# EAGLE board L2-Big (EAGLE 7.2.0)
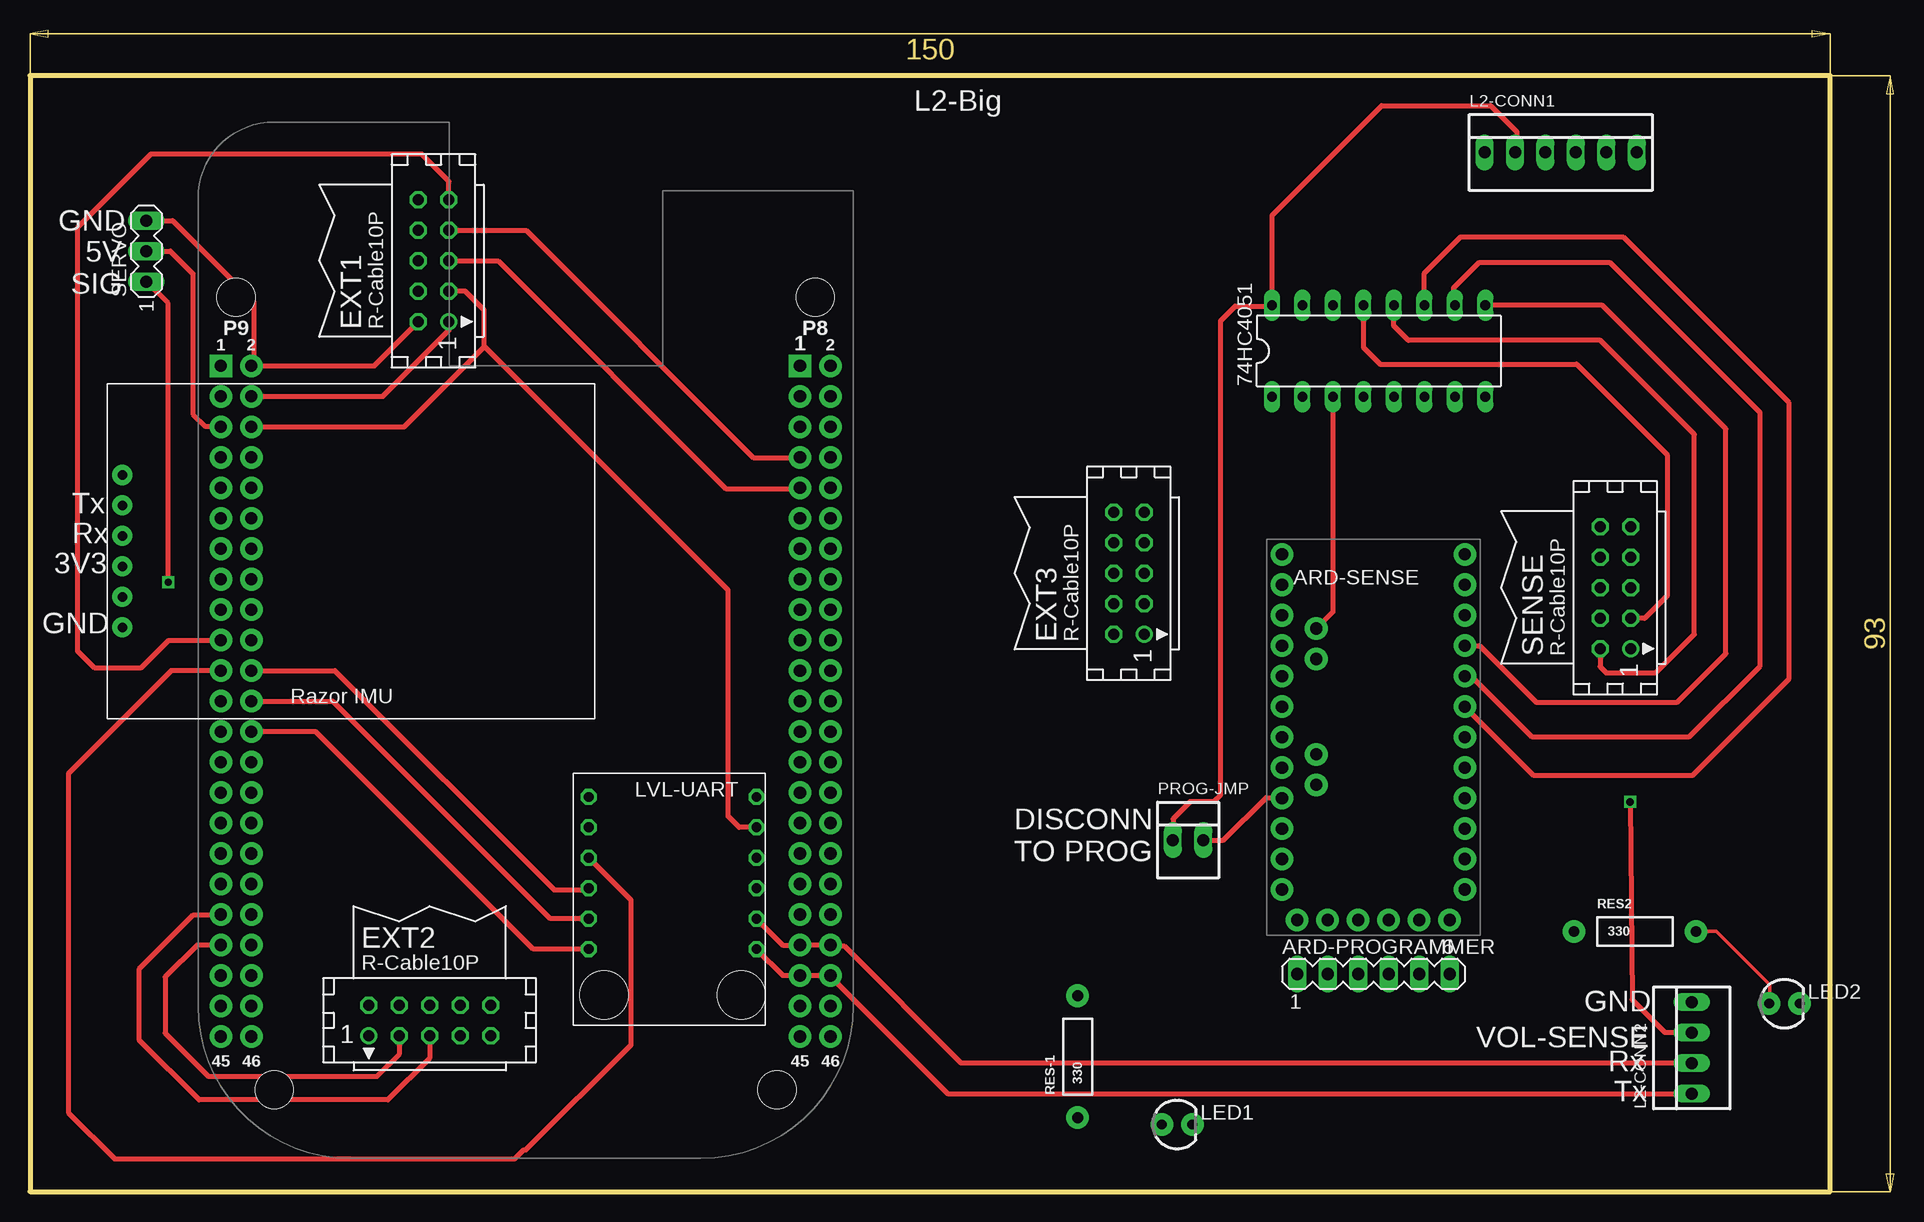
[diagram p0: board, top side]
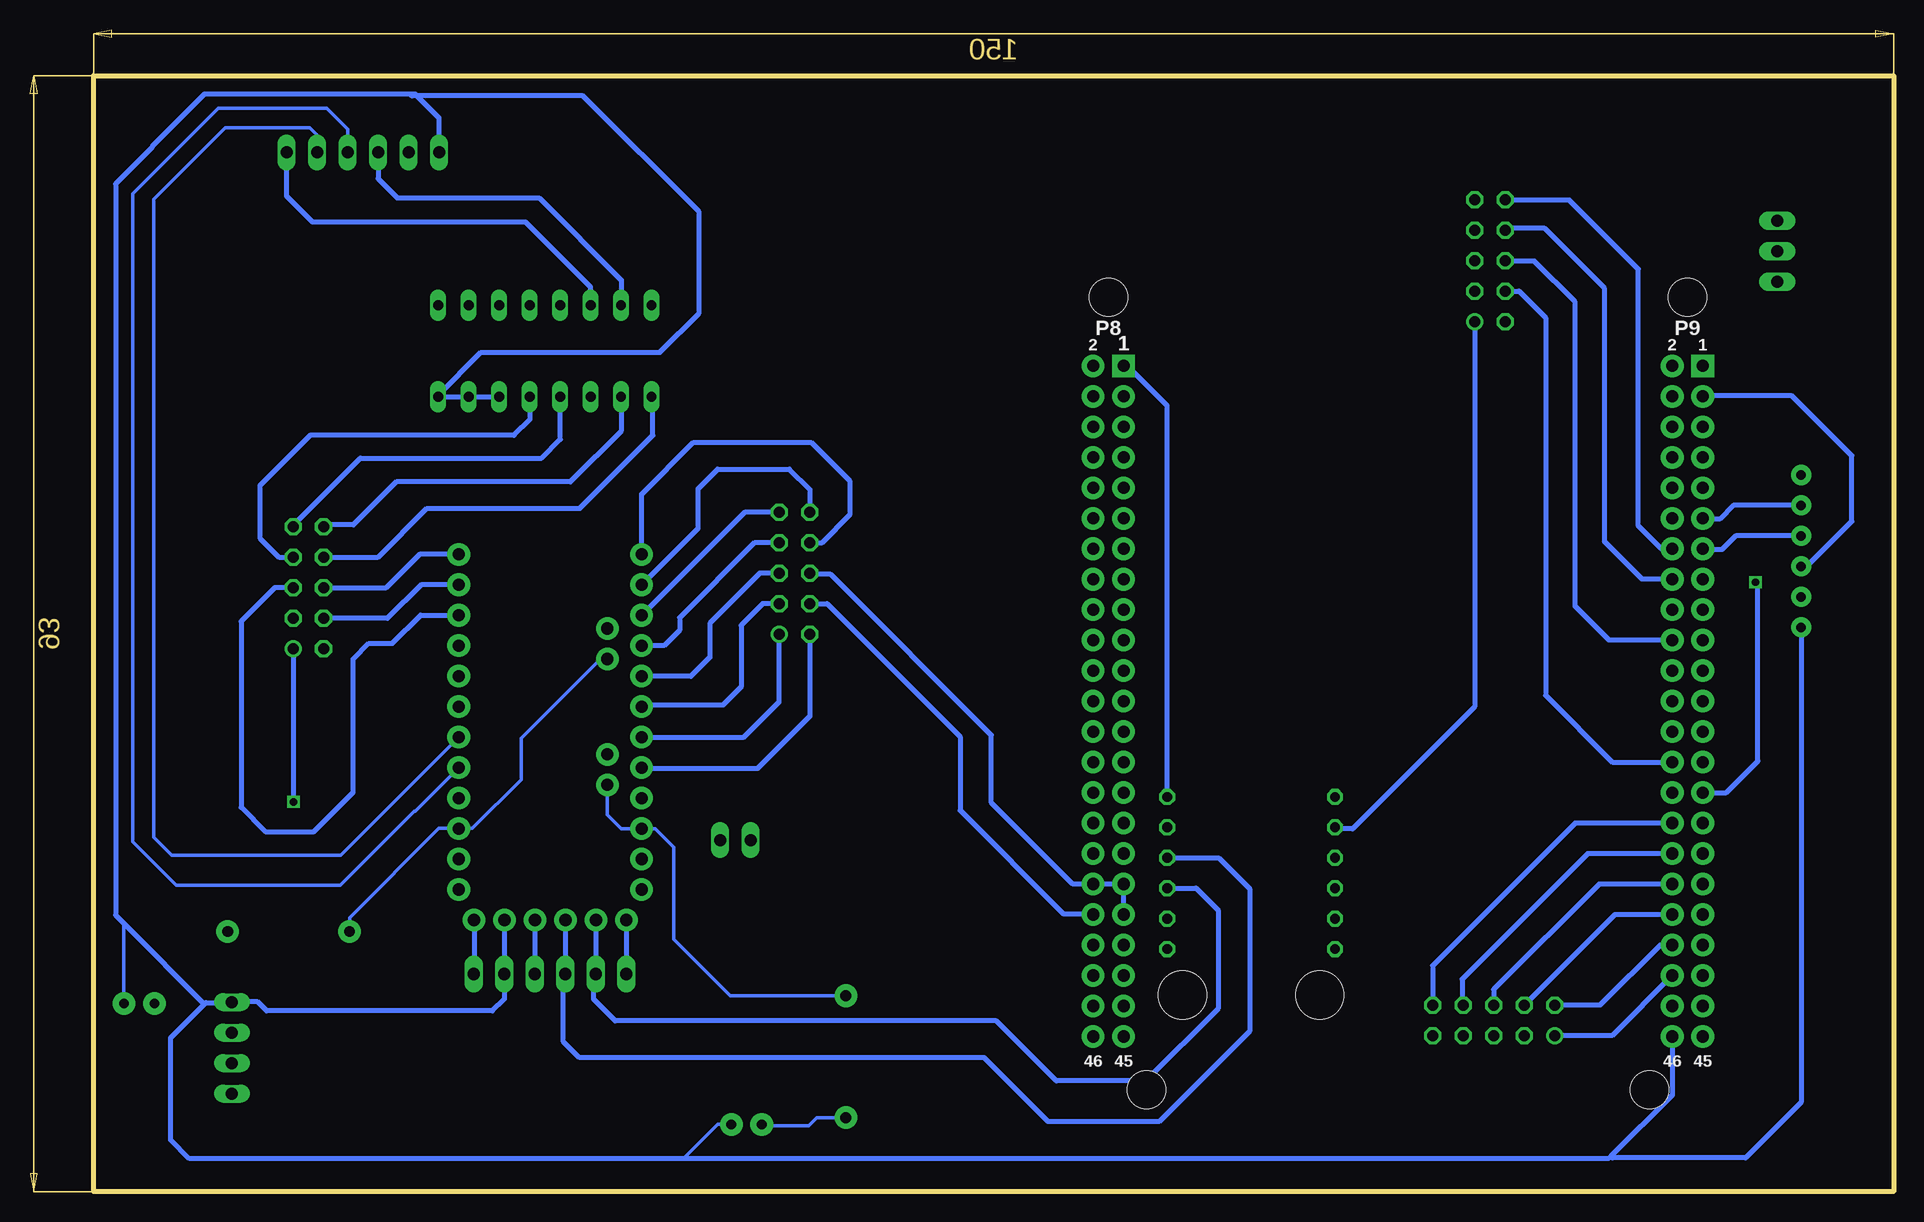
[diagram p1: board, bottom side, seen from below]

Size 150 x 93 mm. Coordinates in mm from the lower left corner, seen from the top.
Outline: 150,0 150,93 0,93 0,0 150,0
Copper layers (1*16): Top 0.035mm / dielectric 1.5mm / Bottom 0.035mm
Design rules "default": minimum track width 10mil, minimum drill 24mil, track to track 8mil, track to pad 8mil, pad to pad 8mil, via to via 8mil, smd to smd 8mil, copper to edge 40mil, drill to drill 8mil, minimum pad ring 10mil, minimum via ring 8mil, stop-mask expansion 4mil, vias tented up to drill 0mil, thermal gap 10mil

## Footprints (pad centres in the part's own frame; a part is rotated, then mirrored left to right if it is on the bottom)
DIL16 = drill 0.813 long: 1 -8.89,-3.81; 2 -6.35,-3.81; 3 -3.81,-3.81; 4 -1.27,-3.81; 5 1.27,-3.81; 6 3.81,-3.81; 7 6.35,-3.81; 8 8.89,-3.81; 9 8.89,3.81; 10 6.35,3.81; 11 3.81,3.81; 12 1.27,3.81; 13 -1.27,3.81; 14 -3.81,3.81; 15 -6.35,3.81; 16 -8.89,3.81
MA06-1 = drill 1.016 long: 1 -6.35,0; 2 -3.81,0; 3 -1.27,0; 4 1.27,0; 5 3.81,0; 6 6.35,0
ARDUINO_PRO_MINI = drill 1.016 pad 1.88: 1 -7.62,12.7; 2 -7.62,10.16; 3 -7.62,7.62; 4 -7.62,5.08; 5 -7.62,2.54; 6 -7.62,0; 7 -7.62,-2.54; 8 -7.62,-5.08; 9 -7.62,-7.62; 10 -7.62,-10.16; 11 -7.62,-12.7; 12 -7.62,-15.24; 13 7.62,-15.24; 14 7.62,-12.7; 15 7.62,-10.16; 16 7.62,-7.62; 17 7.62,-5.08; 18 7.62,-2.54; 19 7.62,0; 20 7.62,2.54; 21 7.62,5.08; 22 7.62,7.62; 23 7.62,10.16; 24 7.62,12.7; A4 4.763,1.429; A5 4.763,3.969; A6 4.763,-9.049; A7 4.763,-6.509; BLK -6.35,15.24; GND -3.81,15.24; GRN 6.35,15.24; RXI 1.27,15.24; TXO 3.81,15.24; VCC -1.27,15.24
BEAGLE_BONE_BLACK_CAPE = drill 1.016 pad 1.88 square: P8.1 20.32,50.165; P9.1 20.32,1.905 | drill 1.016 pad 1.88: P8.2 20.32,52.705; P8.3 22.86,50.165; P8.4 22.86,52.705; P8.5 25.4,50.165; P8.6 25.4,52.705; P8.7 27.94,50.165; P8.8 27.94,52.705; P8.9 30.48,50.165; P8.10 30.48,52.705; P8.11 33.02,50.165; P8.12 33.02,52.705; P8.13 35.56,50.165; P8.14 35.56,52.705; P8.15 38.1,50.165; P8.16 38.1,52.705; P8.17 40.64,50.165; P8.18 40.64,52.705; P8.19 43.18,50.165; P8.20 43.18,52.705; P8.21 45.72,50.165; P8.22 45.72,52.705; P8.23 48.26,50.165; P8.24 48.26,52.705; P8.25 50.8,50.165; P8.26 50.8,52.705; P8.27 53.34,50.165; P8.28 53.34,52.705; P8.29 55.88,50.165; P8.30 55.88,52.705; P8.31 58.42,50.165; P8.32 58.42,52.705; P8.33 60.96,50.165; P8.34 60.96,52.705; P8.35 63.5,50.165; P8.36 63.5,52.705; P8.37 66.04,50.165; P8.38 66.04,52.705; P8.39 68.58,50.165; P8.40 68.58,52.705; P8.41 71.12,50.165; P8.42 71.12,52.705; P8.43 73.66,50.165; P8.44 73.66,52.705; P8.45 76.2,50.165; P8.46 76.2,52.705; P9.2 20.32,4.445; P9.3 22.86,1.905; P9.4 22.86,4.445; P9.5 25.4,1.905; P9.6 25.4,4.445; P9.7 27.94,1.905; P9.8 27.94,4.445; P9.9 30.48,1.905; P9.10 30.48,4.445; P9.11 33.02,1.905; P9.12 33.02,4.445; P9.13 35.56,1.905; P9.14 35.56,4.445; P9.15 38.1,1.905; P9.16 38.1,4.445; P9.17 40.64,1.905; P9.18 40.64,4.445; P9.19 43.18,1.905; P9.20 43.18,4.445; P9.21 45.72,1.905; P9.22 45.72,4.445; P9.23 48.26,1.905; P9.24 48.26,4.445; P9.25 50.8,1.905; P9.26 50.8,4.445; P9.27 53.34,1.905; P9.28 53.34,4.445; P9.29 55.88,1.905; P9.30 55.88,4.445; P9.31 58.42,1.905; P9.32 58.42,4.445; P9.33 60.96,1.905; P9.34 60.96,4.445; P9.35 63.5,1.905; P9.36 63.5,4.445; P9.37 66.04,1.905; P9.38 66.04,4.445; P9.39 68.58,1.905; P9.40 68.58,4.445; P9.41 71.12,1.905; P9.42 71.12,4.445; P9.43 73.66,1.905; P9.44 73.66,4.445; P9.45 76.2,1.905; P9.46 76.2,4.445 | hole 3.175: 14.605,3.175; 80.645,6.35; 80.645,48.26; 14.605,51.435
RAZOR-IMU = drill 0.8 pad 1.676: P$1 1.27,7.62; P$2 1.27,10.16; P$3 1.27,12.7; P$4 1.27,15.24; P$5 1.27,17.78; P$6 1.27,20.32
CON10 = drill 0.914: 1 -5.08,-1.27 | drill 0.914 octagon: 2 -5.08,1.27; 3 -2.54,-1.27; 4 -2.54,1.27; 5 0,-1.27; 6 0,1.27; 7 2.54,-1.27; 8 2.54,1.27; 9 5.08,-1.27; 10 5.08,1.27
22-23-2061 = drill 1 long: 1 -6.35,0; 2 -3.81,0; 3 -1.27,0; 4 1.27,0; 5 3.81,0; 6 6.35,0
22-23-2041 = drill 1 long: 1 -3.81,0; 2 -1.27,0; 3 1.27,0; 4 3.81,0
LED3MM = drill 0.813 pad 1.88: A -1.27,0; K 1.27,0
LEVEL-SHIFTER = drill 0.8 octagon: P$1 1.27,19.05; P$2 1.27,16.51; P$3 1.27,13.97; P$4 1.27,11.43; P$5 1.27,8.89; P$6 1.27,6.35; P$7 15.24,19.05; P$8 15.24,16.51; P$9 15.24,13.97; P$10 15.24,11.43; P$11 15.24,8.89; P$12 15.24,6.35 | hole 4: 13.97,2.54; 2.54,2.54
22-23-2021 = drill 1 long: 1 -1.27,0; 2 1.27,0
AXIAL-0.4 = drill 0.9 pad 1.88: P$1 -5.08,0; P$2 5.08,0
MA03-1 = drill 1.016 long: 1 -2.54,0; 2 0,0; 3 2.54,0

## Placement (x,y rotation side)
74HC4051  [DIL16]  112.39,70.05 0 top
ARD-PROGRAMMER  [MA06-1]  111.96,18.14 0 top
ARD-SENSE  [ARDUINO_PRO_MINI]  111.95,37.87 180 top
BBB  [BEAGLE_BONE_BLACK_CAPE]  14,89.13 270 top
E$1  [RAZOR-IMU]  6.43,39.4 0 top
EXT1  [CON10]  33.64,77.57 90 top
EXT2  [CON10]  33.31,14.27 0 top
EXT3  [CON10]  91.58,51.53 90 top
L2-CONN1  [22-23-2061]  127.56,86.6 0 top
L2-CONN2  [22-23-2041]  138.48,11.98 90 top
LED1  Blue  [LED3MM]  95.59,5.6 0 top
LED2  Blue  [LED3MM]  146.2,15.67 0 top
LVL-UART  [LEVEL-SHIFTER]  45.29,13.85 0 top
PROG-JMP  [22-23-2021]  96.51,29.29 0 top
RES2  330  [AXIAL-0.4]  133.75,21.68 0 top
RES-1  330  [AXIAL-0.4]  87.31,11.24 90 top
SENSE  [CON10]  132.11,50.33 90 top
SERVO  [MA03-1]  9.69,78.37 90 top

## Library data of the parts
74HC4051 = 40xx
ARD-PROGRAMMER SERVO = con-lstb
ARD-SENSE BBB = SparkFun-Boards
E$1 = RazorIMU
EXT1-EXT3 SENSE = con-harting
L2-CONN1 L2-CONN2 PROG-JMP = con-molex
LED1 LED2 = SparkFun-LED
LVL-UART = levelShifter
RES2 RES-1 = SparkFun-Resistors

## Nets
S$1: ARD-SENSE.20 EXT3.2
S$2: ARD-SENSE.19 EXT3.1
S$3: ARD-SENSE.18 EXT3.3
S$4: ARD-SENSE.17 EXT3.5
S$5: L2-CONN2.3 SENSE.1
S$6: 74HC4051.15 L2-CONN1.3
S$7: 74HC4051.16 L2-CONN1.2 PROG-JMP.1
S$8: 74HC4051.14 L2-CONN1.6
S$9: 74HC4051.2 SENSE.10
S$10: 74HC4051.1 SENSE.8
S$11: 74HC4051.4 SENSE.9
S$12: 74HC4051.5 SENSE.7
S$13: 74HC4051.9 ARD-SENSE.9
S$14: 74HC4051.10 ARD-SENSE.8
S$15: 74HC4051.11 ARD-SENSE.7
S$16: ARD-SENSE.11 SENSE.4
S$17: ARD-SENSE.12 SENSE.6
S$18: ARD-SENSE.10 SENSE.5
S$19: 74HC4051.13 SENSE.3
S$20: 74HC4051.12 SENSE.2
S$21: BBB.P9.19 EXT1.9
S$22: ARD-SENSE.16 EXT3.7
S$23: ARD-SENSE.15 EXT3.9
S$24: ARD-SENSE.14 EXT3.10
S$25: ARD-SENSE.13 EXT3.8
S$26: BBB.P9.24 LVL-UART.P$5
S$27: BBB.P9.26 LVL-UART.P$6
S$28: BBB.P8.41 BBB.P8.42 L2-CONN2.1 LVL-UART.P$12
S$29: BBB.P8.39 BBB.P8.40 L2-CONN2.2 LVL-UART.P$11
S$30: BBB.P9.22 LVL-UART.P$4
S$31: BBB.P9.21 LVL-UART.P$3
S$32: 74HC4051.3 ARD-SENSE.A6
S$33: ARD-PROGRAMMER.2 ARD-SENSE.TXO LVL-UART.P$10
S$34: ARD-PROGRAMMER.3 ARD-SENSE.RXI LVL-UART.P$9
S$35: BBB.P8.38 EXT3.4
S$36: BBB.P8.35 BBB.P8.36 BBB.P8.37 EXT3.6
S$37: BBB.P8.1 LVL-UART.P$7
S$38: BBB.P9.4 EXT1.1 LVL-UART.P$2
S$39: BBB.P9.6 EXT1.3 LVL-UART.P$8
S$40: BBB.P9.2 EXT1.2 SERVO.3
S$41: BBB.P9.5 SERVO.2
S$42: BBB.P9.14 EXT1.10
S$43: BBB.P9.39 EXT2.3
S$44: BBB.P9.37 EXT2.5
S$45: ARD-SENSE.6 L2-CONN1.5
S$46: ARD-SENSE.5 L2-CONN1.4
S$47: BBB.P9.42 EXT2.1
S$48: BBB.P9.40 EXT2.2
S$49: BBB.P9.38 EXT2.4
S$50: BBB.P9.36 EXT2.6
S$51: BBB.P9.34 EXT2.8
S$52: BBB.P9.32 EXT2.10
S$53: BBB.P9.11 E$1.P$5
S$54: BBB.P9.13 E$1.P$4
S$55: ARD-SENSE.21 PROG-JMP.2
S$56: ARD-SENSE.3 ARD-SENSE.A7 RES2.P$1
S$57: BBB.P9.16 EXT1.8
S$58: BBB.P9.20 EXT1.6
S$59: BBB.P9.28 EXT1.4
S$60: LED2.A RES2.P$2
S$61: BBB.P8.7 EXT1.7
S$62: BBB.P8.9 EXT1.5
S$63: BBB.P9.29 SERVO.1
S$64: BBB.P9.3 E$1.P$3
S$65: ARD-PROGRAMMER.1 ARD-SENSE.GRN
S$66: ARD-PROGRAMMER.4 ARD-SENSE.VCC
S$67: ARD-PROGRAMMER.6 ARD-SENSE.BLK
S$68: 74HC4051.6 74HC4051.7 74HC4051.8 ARD-PROGRAMMER.5 ARD-SENSE.GND BBB.P9.46 E$1.P$1 L2-CONN1.1 L2-CONN2.4 LED1.K LED2.K
S$69: ARD-SENSE.22 ARD-SENSE.A5 RES-1.P$2
S$70: LED1.A RES-1.P$1

## Tracks (layer width: path | path; a pad name or v marks a point on that pad's centre or on a via)
S$1
  Bottom 0.406: EXT3.2 90.31,39.62 94.68,35.25 104.25,35.25 ARD-SENSE.20
S$2
  Bottom 0.406: ARD-SENSE.19 95.82,37.87 92.88,40.81 92.88,46.42 EXT3.1
S$3
  Bottom 0.406: EXT3.3 94.24,48.99 96.04,47.19 96.04,42.06 97.56,40.54 104.2,40.54 ARD-SENSE.18
S$4
  Bottom 0.406: EXT3.5 94.47,51.53 98.65,47.35 98.65,44.52 100.23,42.94 ARD-SENSE.17
S$5  (via drill 0.6)
  Top 0.406: v133.34,32.47 133.5,16 136.23,13.27 138.46,13.27 L2-CONN2.3
  Bottom 0.406: SENSE.1 133.38,32.51 v133.34,32.47
S$6
  Bottom 0.406: L2-CONN1.3 126.29,84.41 124.7,82.82 112.87,82.82 106.01,75.96 106.01,73.89 74HC4051.15
S$7
  Top 0.406: L2-CONN1.2 123.9,86.75 123.9,88.32 121.72,90.5 112.64,90.5 103.5,81.36 74HC4051.16 103.43,73.79 100.43,73.79 99.21,72.57 99.21,33.05 98.65,32.49 96.67,32.49 95.25,31.07 PROG-JMP.1
S$8
  Bottom 0.406: 74HC4051.14 108.58,75.38 113.99,80.79 131.75,80.79 133.91,82.95 L2-CONN1.6
S$9
  Bottom 0.406: 74HC4051.2 106.04,63.37 110.26,59.15 124.77,59.15 128.36,55.56 130.69,55.56 SENSE.10
S$10
  Bottom 0.406: SENSE.8 126.28,52.87 122.22,56.93 109.48,56.93 103.4,63.01 103.4,66.14 74HC4051.1
S$11
  Bottom 0.406: SENSE.9 133.38,55.51 127.77,61.12 112.67,61.12 111.11,62.68 74HC4051.4
S$12
  Bottom 0.406: 74HC4051.5 113.66,64.32 114.97,63.01 131.96,63.01 136.14,58.83 136.14,54.45 134.57,52.88 SENSE.7
S$13
  Top 0.406: ARD-SENSE.9 120.8,45.49 125.51,40.78 137.28,40.78 141.33,44.83 141.33,63.57 131.04,73.86 74HC4051.9
S$14
  Top 0.406: ARD-SENSE.8 120.12,42.95 125.16,37.91 138.29,37.91 144.17,43.79 144.17,64.91 131.69,77.39 120.71,77.39 118.62,75.3 118.62,73.98 74HC4051.10
S$15
  Top 0.406: 74HC4051.11 116.2,76.55 119.21,79.56 132.76,79.56 146.56,65.76 146.56,42.68 138.54,34.66 125.32,34.66 ARD-SENSE.7
S$16
  Bottom 0.406: ARD-SENSE.11 122.7,50.57 125.51,47.76 130.81,47.76 SENSE.4
S$17
  Bottom 0.406: ARD-SENSE.12 122.84,53.11 125.66,50.29 130.8,50.29 SENSE.6
S$18
  Bottom 0.406: SENSE.5 134.9,50.33 137.71,47.52 137.71,32.02 135.69,30 131.64,30 128.37,33.27 128.37,44.38 127.06,45.69 125.1,45.69 122.75,48.04 ARD-SENSE.10
S$19
  Top 0.406: 74HC4051.13 111.12,70.36 112.52,68.96 128.89,68.96 136.43,61.42 136.43,49.64 134.55,47.76 133.41,47.76 SENSE.3
S$20
  Top 0.406: SENSE.2 130.84,43.74 131.35,43.23 135.48,43.23 138.69,46.44 138.69,63.11 130.87,70.93 114.87,70.93 113.64,72.16 113.64,73.84 74HC4051.12
S$21
  Top 0.406: EXT1.9 34.91,84.19 32.65,86.45 10.08,86.45 3.95,80.32 3.95,45.07 5.36,43.66 9.28,43.66 11.56,45.94 15.89,45.94 BBB.P9.19
S$22
  Bottom 0.406: EXT3.7 94.93,54.07 101.16,47.84 101.16,46.8 102.46,45.5 ARD-SENSE.16
S$23
  Bottom 0.406: EXT3.9 95.75,56.61 ARD-SENSE.15
S$24
  Bottom 0.406: ARD-SENSE.14 99.63,55.27 99.63,58.57 97.99,60.21 92.01,60.21 90.31,58.51 EXT3.10
S$25
  Bottom 0.406: ARD-SENSE.13 104.33,58.12 100.01,62.44 90.21,62.44 87,59.23 87,56.39 89.34,54.05 90.29,54.05 EXT3.8
S$26
  Top 0.406: BBB.P9.24 25.22,40.87 43.3,22.79 46.51,22.79 LVL-UART.P$5
S$27
  Top 0.406: LVL-UART.P$6 41.94,20.2 23.81,38.33 BBB.P9.26
S$28
  Top 0.406: LVL-UART.P$12 62.72,18.01 BBB.P8.41 64.19,17.98 66.66,17.98 | BBB.P8.42 66.67,17.98 66.66,17.98 | 66.66,17.98 76.47,8.17 L2-CONN2.1
S$29
  Top 0.406: L2-CONN2.2 77.6,10.71 67.88,20.43 66.83,20.43 BBB.P8.40 BBB.P8.39 62.72,20.55 LVL-UART.P$11
S$30
  Top 0.406: BBB.P9.22 25.41,43.41 43.68,25.14 46.42,25.14 LVL-UART.P$4
S$31
  Top 0.406: BBB.P9.21 11.76,43.41 3.19,34.84 3.19,6.58 7.05,2.72 40.38,2.72 41.13,3.47 41.33,3.47 50.09,12.23 50.09,24.29 LVL-UART.P$3
S$32
  Top 0.406: 74HC4051.3 108.58,48.31 ARD-SENSE.A6
S$33
  Bottom 0.406: LVL-UART.P$10 58.13,25.28 56.3,23.45 56.3,15.25 62.33,9.22 69.76,9.22 74.76,14.22 106.53,14.22 108.34,16.03 108.34,17.95 ARD-PROGRAMMER.2 | 108.19,18.1 ARD-PROGRAMMER.2 | ARD-SENSE.TXO ARD-PROGRAMMER.2
S$34
  Bottom 0.406: LVL-UART.P$9 56.24,27.82 53.66,25.24 53.66,13.37 61.2,5.83 70.45,5.83 75.78,11.16 109.52,11.16 110.85,12.49 110.85,17.98 ARD-PROGRAMMER.3 | 110.83,18 ARD-PROGRAMMER.3 | ARD-SENSE.RXI ARD-PROGRAMMER.3
S$35
  Bottom 0.406: EXT3.4 88.87,48.99 77.8,37.92 77.8,31.76 69.2,23.16 66.78,23.16 BBB.P8.38
S$36
  Bottom 0.406: BBB.P8.37 BBB.P8.35 BBB.P8.36 68.4,25.63 75.19,32.42 75.19,38.05 88.58,51.44 90.22,51.44 EXT3.6
S$37
  Bottom 0.406: BBB.P8.1 63.85,68.81 60.56,65.52 60.56,32.93 LVL-UART.P$7
S$38
  Top 0.406: BBB.P9.4 29.41,66.27 34.9,71.76 EXT1.1
  Bottom 0.406: EXT1.1 34.91,40.41 45.09,30.23 46.43,30.23 LVL-UART.P$2
S$39
  Top 0.406: BBB.P9.6 31.17,63.73 37.84,70.4 37.84,70.46 | 37.84,70.46 37.84,73.46 36.26,75.04 EXT1.3 | LVL-UART.P$8 59.09,30.36 58.18,31.27 58.18,50.12 37.84,70.46
S$40
  Top 0.406: EXT1.2 28.69,68.81 BBB.P9.2 18.66,69.03 18.66,74.14 11.89,80.91 SERVO.3
S$41
  Top 0.406: SERVO.2 11.7,78.37 13.58,76.49 13.58,64.8 14.61,63.77 15.86,63.77 BBB.P9.5
S$42
  Bottom 0.406: BBB.P9.14 19.36,53.57 21.27,55.48 21.27,76.88 27.01,82.62 32.34,82.62 EXT1.10
S$43
  Top 0.406: BBB.P9.39 13.92,20.55 11.27,17.9 11.27,13.2 14.87,9.6 28.91,9.6 30.81,11.5 30.81,12.96 EXT2.3
S$44
  Top 0.406: EXT2.5 33.31,11.12 29.83,7.64 14.09,7.64 9.12,12.61 9.12,18.57 13.62,23.07 15.89,23.07 BBB.P9.37
S$45
  Bottom 0.305: ARD-SENSE.6 129.41,28.04 143.47,28.04 144.97,29.54 144.97,82.69 139.02,88.64 131.97,88.64 131.31,87.98 131.31,86.66 L2-CONN1.5
  Bottom 0.406: ARD-SENSE.6
S$46
  Bottom 0.305: L2-CONN1.4 128.83,88.51 130.59,90.27 139.61,90.27 146.73,83.15 146.73,29.15 143.1,25.52 129.44,25.52 123.27,31.69 123.21,31.69 ARD-SENSE.5
S$47
  Bottom 0.406: BBB.P9.42 23.45,13 EXT2.1
S$48
  Bottom 0.406: BBB.P9.40 19.46,20.55 24.48,15.53 EXT2.2
S$49
  Bottom 0.406: BBB.P9.38 23.22,23.09 EXT2.4
S$50
  Bottom 0.406: BBB.P9.36 24.55,25.63 33.33,16.85 33.33,15.56 EXT2.6
S$51
  Bottom 0.406: BBB.P9.34 25.49,28.17 35.96,17.7 35.96,15.65 EXT2.8
S$52
  Bottom 0.406: BBB.P9.32 26.53,30.71 38.41,18.83 38.41,15.56 EXT2.10
S$53
  Bottom 0.406: E$1.P$5 13.36,57.18 14.49,56.05 15.84,56.05 BBB.P9.11
S$54
  Bottom 0.406: E$1.P$4 13.17,54.64 14.31,53.5 15.83,53.5 BBB.P9.13
S$55
  Top 0.406: PROG-JMP.2 99.45,29.29 103,32.84 104.28,32.84 ARD-SENSE.21
S$56
  Bottom 0.305: RES2.P$1 128.67,22.84 121.25,30.26 ARD-SENSE.3 118.44,30.26 114.38,34.32 114.38,37.78 107.78,44.38 ARD-SENSE.A7
S$57
  Bottom 0.406: BBB.P9.16 20.96,51.03 24.09,54.16 24.09,75.27 29.08,80.26 32.22,80.26 EXT1.8
S$58
  Bottom 0.406: BBB.P9.20 23.7,45.95 26.54,48.79 26.54,74.14 29.93,77.53 32.33,77.53 EXT1.6
S$59
  Bottom 0.406: EXT1.4 31.2,75.03 28.99,72.82 28.99,41.35 23.43,35.79 BBB.P9.28
S$60
  Top 0.305: RES2.P$2 140.54,21.68 144.97,17.25 144.97,15.71 LED2.A
S$61
  Top 0.406: EXT1.7 41.35,80.11 60.29,61.17 64.14,61.17 BBB.P8.7
S$62
  Top 0.406: EXT1.5 39,77.57 57.98,58.59 64.11,58.59 BBB.P8.9
S$63  (via drill 0.6)
  Top 0.406: v11.51,50.77 11.51,74.01 SERVO.1
  Bottom 0.406: BBB.P9.29 13.95,33.25 11.32,35.88 11.32,50.58 v11.51,50.77
S$64
  Bottom 0.406: E$1.P$3 7.24,52.1 3.48,55.86 3.48,61.33 8.47,66.32 15.86,66.32 BBB.P9.3
S$65
  Bottom 0.406: ARD-SENSE.GRN ARD-PROGRAMMER.1
S$66
  Bottom 0.406: ARD-SENSE.VCC ARD-PROGRAMMER.4
S$67
  Bottom 0.406: ARD-SENSE.BLK ARD-PROGRAMMER.6
S$68
  Bottom 0.305: LED1.K 98,5.6 100.86,2.74 | LED2.K 147.47,22.14 147.38,22.23
  Bottom 0.406: L2-CONN1.1 121.21,89.45 123.21,91.45 123.6,91.45 | BBB.P9.46 18.44,8.04 23.56,2.93 | 23.56,2.93 23.75,2.74 100.86,2.74 142.01,2.74 143.58,4.31 143.58,12.81 140.76,15.62 | 140.76,15.62 140.64,15.75 138.52,15.75 L2-CONN2.4 138.46,15.81 136.34,15.81 135.59,15.06 116.76,15.06 115.77,16.05 ARD-PROGRAMMER.5 ARD-SENSE.GND | 140.76,15.62 147.38,22.23 148.17,23.03 148.17,83.98 145.15,87 145.15,87.07 140.77,91.45 123.6,91.45 | E$1.P$1 7.7,7.44 12.33,2.81 23.44,2.81 23.56,2.93 | 74HC4051.6 74HC4051.7 74HC4051.8 121.28,66.38 117.72,69.94 102.82,69.94 99.55,73.21 99.55,81.65 109.22,91.32 123.47,91.32 123.6,91.45
S$69
  Bottom 0.305: ARD-SENSE.A5 107.19,31.4 106.02,30.23 104.35,30.23 ARD-SENSE.22 103.2,30.25 101.64,28.69 101.64,21.05 96.93,16.34 87.33,16.34 RES-1.P$2
S$70
  Bottom 0.305: RES-1.P$1 89.72,6.16 90.4,5.48 94.2,5.48 LED1.A

## Text on the board
tPlace: L2-Big | GND | 5V | SIG | Tx | Rx | 3V3 | GND | DISCONN / TO PROG | GND | VOL-SENSE | Rx | Tx